# Altium PCB RX_Board.PcbDoc (part 4 of 5)
Units mm, origin at the board's own origin, x right, y up, seen from the top; angles counter-clockwise.
Board outline 69 x 69 mm, 4 copper layers (Top Layer, Int1 (GND), Int2 (GND), Bottom Layer), stack 1.586 mm thick; 118 components, 59 nets, 325 pads, 477 vias.
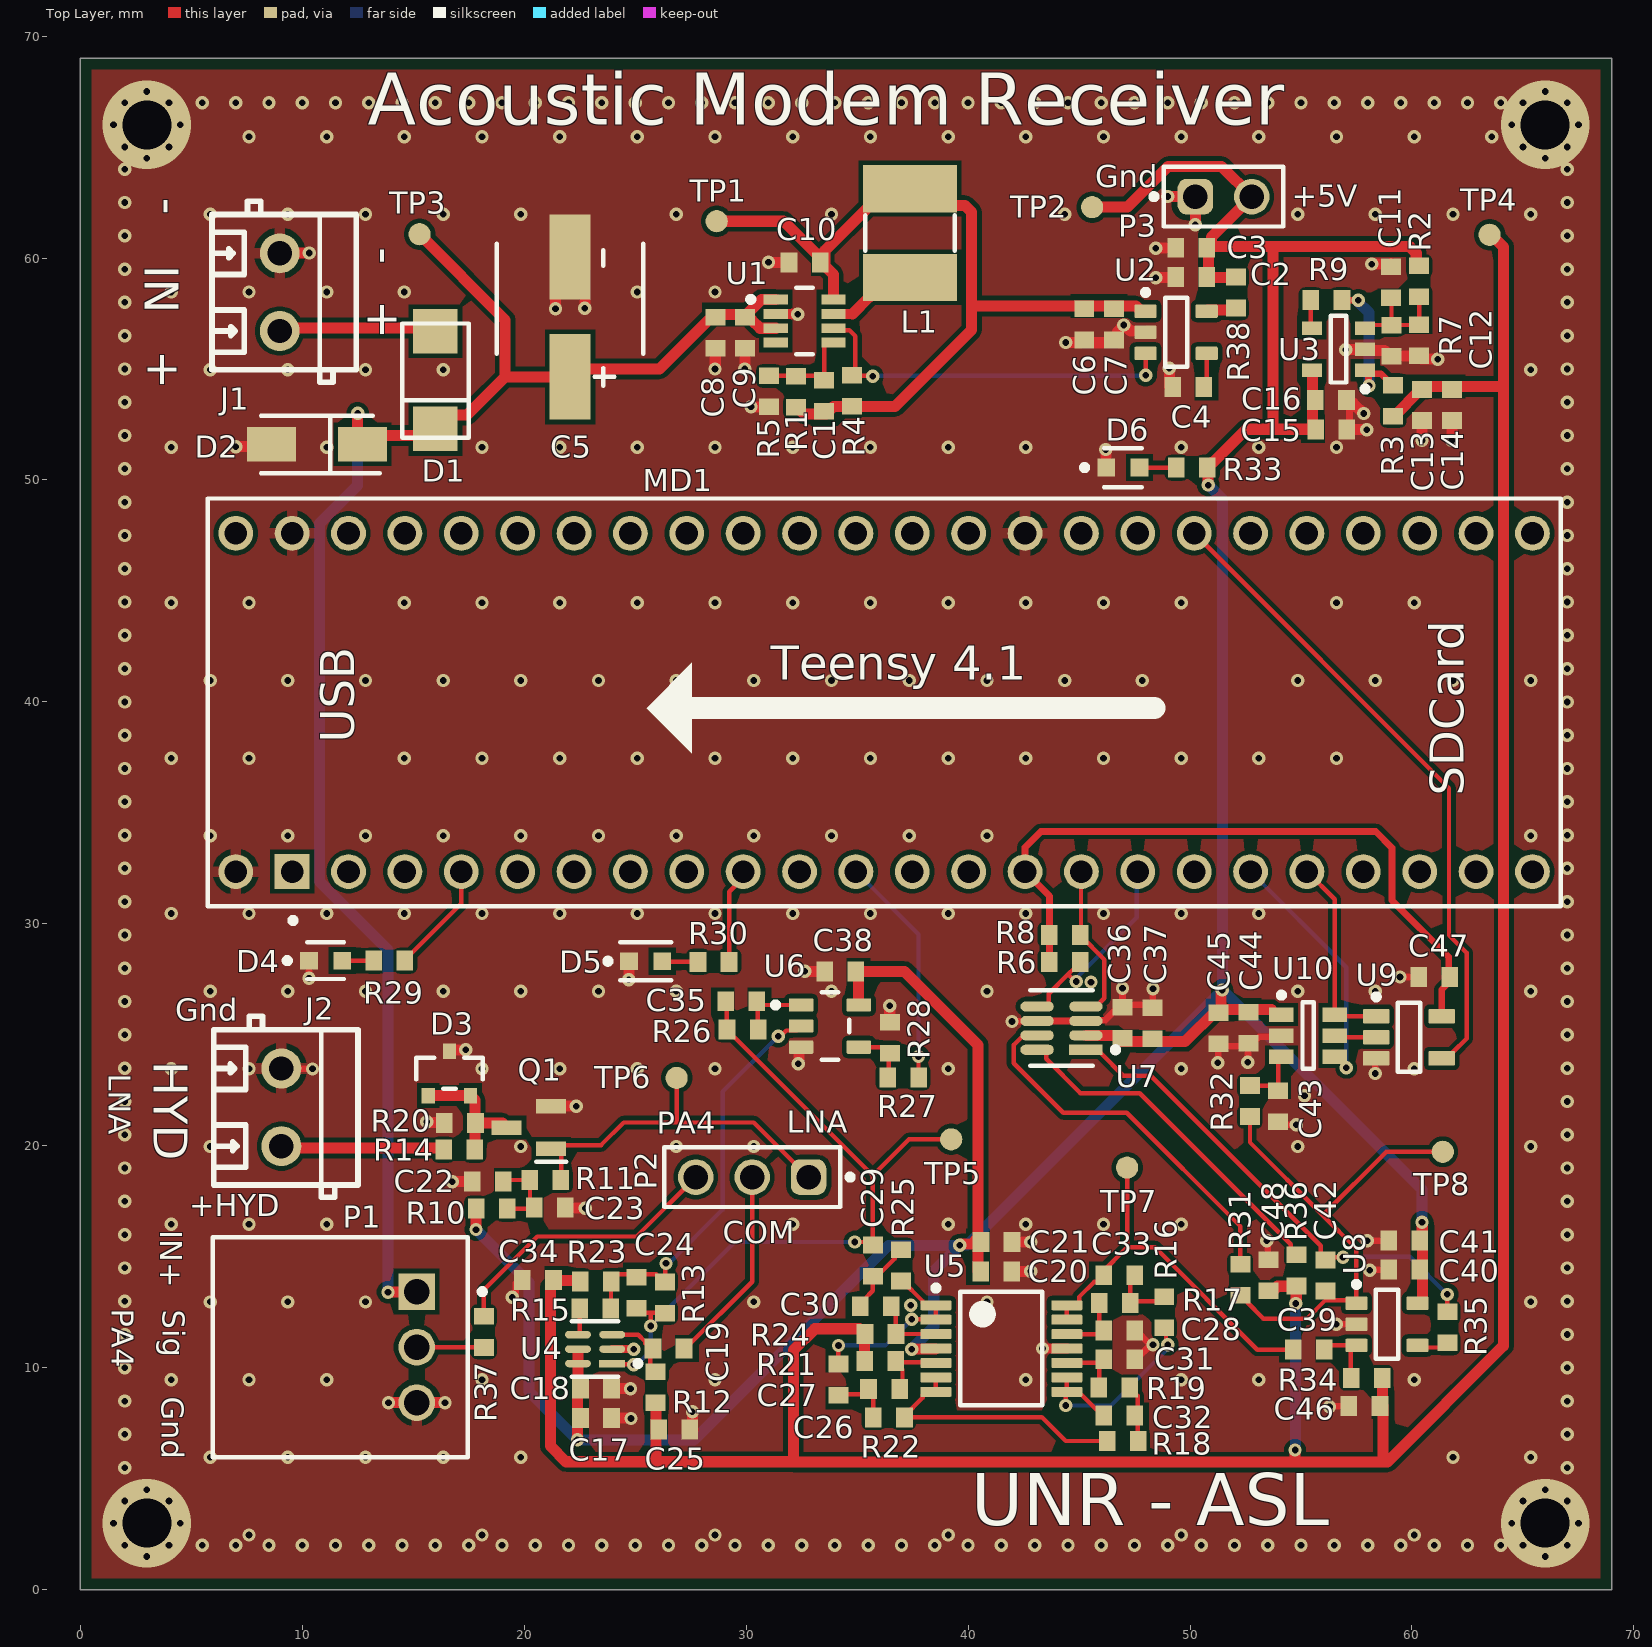
[diagram p0: Top Layer view]

## Part data (continued)
R37: library part 0603WAF3300T5E, "Fixed Resistor, Metal Glaze/thick Film, 0.1W, 330ohm, 75V, 1% +/-Tol, 100ppm/Cel, Surface Mount, 0603", Case/Package=0603, JLCPCB Part Number=C23138, Manufacturer="Royal Ohm", Max Operating Temperature=155°C, Min Operating Temperature=-55°C, Power Rating=100mW, Supplier Part Number=303-0603WAF3300T5E, Temperature Coefficient=100ppm/°C, Tolerance=1%, Working Voltage=75V, Category="Chip SMD Resistors", China RoHS=Non-Compliant, ComponentLink1Description=https://datasheet.octopart.com:443/0603WAF3300T5E-Royal-Ohm-datasheet-157855877.pdf?src-supplier=IHS, ComponentLink1URL=https://datasheet.octopart.com:443/0603WAF3300T5E-Royal-Ohm-datasheet-157855877.pdf?src-supplier=IHS, ComponentLink2Description=https://datasheet.octopart.com:443/0603WAF3300T5E-Royal-Ohm-datasheet-165785611.pdf?src-supplier=TME, ComponentLink2URL=https://datasheet.octopart.com:443/0603WAF3300T5E-Royal-Ohm-datasheet-165785611.pdf?src-supplier=TME, ComponentLink3Description=https://datasheet.octopart.com:443/0603WAF3300T5E-Royal-Ohm-datasheet-62069544.pdf?src-supplier=TME, ComponentLink3URL=https://datasheet.octopart.com:443/0603WAF3300T5E-Royal-Ohm-datasheet-62069544.pdf?src-supplier=TME, Country of Origin=Thailand, Export Control Classification Number (ECCN) Code=EAR99, Harmonized Tariff Schedule (HTS) Code=8533.21.00.30, Introduction Date=2016-08-18, Lifecycle Status=Production, Manufacturer Part Number=0603WAF3300T5E, Mounting Technology="Surface Mount", Number of Terminals=2, Pricing="10000=0.001 (USD)", REACH SVHC=Unaffected, RoHS=Compliant, Supplier=Mouser
R38: library part RC0603FR-070RL, "Zero Ohm Resistor, Jumper, 0603 [1608 Metric], Thick Film, 100 mW, 1 A, Surface Mount", Case Code (Imperial)=0603, Current Rating=1A, JLCPCB Part Number=C100044, Manufacturer="Yageo Group", Max Operating Temperature=155°C, Max Power Dissipation=100mW, Min Operating Temperature=-55°C, Temperature Coefficient=200ppm/°C, Tolerance=1%, Voltage Rating=75V, Voltage Rating (DC)=50V, Case/Package=0603, Category="Chip SMD Resistors", China RoHS=Non-Compliant, ComponentLink1Description=https://datasheet.octopart.com:443/RC0603FR-070RL-Yageo-datasheet-127823281.pdf?src-supplier=Upverter, ComponentLink1URL=https://datasheet.octopart.com:443/RC0603FR-070RL-Yageo-datasheet-127823281.pdf?src-supplier=Upverter, ComponentLink2Description=https://datasheet.octopart.com:443/RC0603FR-070RL-Yageo-datasheet-30459151.pdf?src-supplier=IHS, ComponentLink2URL=https://datasheet.octopart.com:443/RC0603FR-070RL-Yageo-datasheet-30459151.pdf?src-supplier=IHS, ComponentLink3Description=https://datasheet.octopart.com:443/RC0603FR-070RL-Yageo-datasheet-8328172.pdf?src-supplier=element14+APAC, ComponentLink3URL=https://datasheet.octopart.com:443/RC0603FR-070RL-Yageo-datasheet-8328172.pdf?src-supplier=element14+APAC, ComponentLink4Description=https://datasheet.octopart.com:443/RC0603FR-070RL-Yageo-datasheet-34211833.pdf?src-supplier=Newark, ComponentLink4URL=https://datasheet.octopart.com:443/RC0603FR-070RL-Yageo-datasheet-34211833.pdf?src-supplier=Newark, ComponentLink5Description=https://datasheet.octopart.com:443/RC0603FR-070RL-Yageo-Group-datasheet-176638170.pdf?src-supplier=Future+Electronics, ComponentLink5URL=https://datasheet.octopart.com:443/RC0603FR-070RL-Yageo-Group-datasheet-176638170.pdf?src-supplier=Future+Electronics, ComponentLink6Description=https://datasheet.octopart.com:443/RC0603FR-070RL-Yageo-datasheet-164759695.pdf?src-supplier=Future+Electronics, ComponentLink6URL=https://datasheet.octopart.com:443/RC0603FR-070RL-Yageo-datasheet-164759695.pdf?src-supplier=Future+Electronics, ComponentLink7Description=https://datasheet.octopart.com:443/RC0603FR-070RL-Yageo-datasheet-137700087.pdf?src-supplier=Future+Electronics, ComponentLink7URL=https://datasheet.octopart.com:443/RC0603FR-070RL-Yageo-datasheet-137700087.pdf?src-supplier=Future+Electronics, ComponentLink8Description=https://datasheet.octopart.com:443/RC0603FR-070RL-Yageo-datasheet-15599030.pdf?src-supplier=Future+Electronics, ComponentLink8URL=https://datasheet.octopart.com:443/RC0603FR-070RL-Yageo-datasheet-15599030.pdf?src-supplier=Future+Electronics, ComponentLink9Description=https://datasheet.octopart.com:443/RC0603FR-070RL-Yageo-datasheet-12596169.pdf?src-supplier=Future+Electronics, ComponentLink9URL=https://datasheet.octopart.com:443/RC0603FR-070RL-Yageo-datasheet-12596169.pdf?src-supplier=Future+Electronics, ComponentLink10Description=https://datasheet.octopart.com/RC0603FR-070RL-Yageo-datasheet-73766026.pdf, ComponentLink10URL=https://datasheet.octopart.com/RC0603FR-070RL-Yageo-datasheet-73766026.pdf, ComponentLink11Description=http://sigma.octopart.com:80/conflict_mineral_statement/Yageo-company-3.pdf?src-supplier=Compliance+Statements, ComponentLink11URL=http://sigma.octopart.com:80/conflict_mineral_statement/Yageo-company-3.pdf?src-supplier=Compliance+Statements, ComponentLink12Description=http://sigma.octopart.com:80/rohs_statement/Yageo-company-2.pdf?src-supplier=Compliance+Statements, ComponentLink12URL=http://sigma.octopart.com:80/rohs_statement/Yageo-company-2.pdf?src-supplier=Compliance+Statements, Composition="Thick Film", Contact Plating=Tin, Depth=800µm, Features="Moisture Resistant", Height=450µm, Lead Free="Lead Free", Length=1.6mm, Lifecycle Status=Production, Manufacturer Part Number=RC0603FR-070RL, Military Standard=Not, Mounting Technology="Surface Mount", Number of Terminals=2, Number of Terminations=2, Packaging="Tape & Reel", Pins=2, Power Rating=100mW, Pricing="1=0.101, 25=0.009, 100=0.008, 250=0.007, 500=0.006, 1000=0.005, 2500=0.004 (USD)", Radiation Hardening=No, REACH SVHC=Unaffected, RoHS=Compliant, Schedule B="8533210045, 8533210045|8533210045|8533210045|8533210045|8533210045", Stock=190618, Supplier=Avnet, Supplier Part Number=RC0603FR-070RL, Termination=SMD/SMT, Width=800µm, Working Voltage=75V
U1: library part CMP-04918-000358-1, "IC REG BUCK ADJ 75MA SOT23-8", Case/Package=SOT-23-8, Max Input Voltage=15V, Max Operating Temperature=85°C, Max Output current=75mA, Max Output Voltage=5.5V, Min Input Voltage=2V, Min Operating Temperature=-40°C, Min Output Voltage=1.2V, Package Quantity=1, Quiescent Current=11uA, Switching Frequency=800kHz, Efficiency=96%, Lead Free="Lead Free", Mount="Surface Mount", Number of Outputs=1, Number of Pins=8, Operating Supply Voltage=15V, Output Current=75mA, Output Type=Adjustable, Output Voltage=5.5V, Packaging="Tape and Reel", Radiation Hardening=No, REACH SVHC="No SVHC", RoHS Compliant=Yes, Series=-, Synchronous Rectifier=Yes
U2: library part CMP-0394-00659-2, "Single Output Fast Transient Response LDO, 150 mA, Fixed 5 V Output, 1.7 to 5.5 V Input, 5-pin SOT-23 (DBV), -40 to 85 degC, Green (RoHS & no Sb/Br)", Manufacturer="Texas Instruments", Accuracy(%)=1, Code_JEDEC=MO-178, ComponentLink1Description="Manufacturer URL", ComponentLink1URL=http://www.ti.com/, ComponentLink2Description=Datasheet, ComponentLink2URL=http://www.ti.com/general/docs/lit/getliterature.tsp?genericPartNumber=TPS73150&fileType=pdf, ComponentLink3Description="Package Specification", ComponentLink3URL=http://www.ti.com/litv/pdf/mpds018i, DatasheetVersion=SBVS034M, Eco-Plan="Green (RoHS & no Sb/Br)", Fixed Output Options(V)=5, Iout(Max)(A)=0.15, Iq(Typ)(mA)=0.4, Mounting Technology="Surface Mount", PackageDescription="5-Pin Plastic Small Outline, Body 1.60 Ãƒâ€” 2.90 mm, Pitch 0.95 mm", PackageReference=DBV0005A, PackageVersion=4073253-4/K, PartNumber=TPS73150DBVR, SubFamily="Single Channel LDO", Vdo(Typ)(mV)=30, Vin(Max)(V)=5.5, Vin(Min)(V)=1.7, Vout Adj(Max)(V)=5, Vout Adj(Min)(V)=5
U3: library part CMP-0384-01443-3, "Single Channel RRIO Operational Amplifier, 80 MHz BW, 35 V/us SR, Industrial, 5-pin SOT23 (RJ-5), Reel", Amplifiers Per Package=1, Generic Part Number=AD8031, Input Bias Current=450nA, Input Offset Voltage=1mV, Manufacturer="Analog Devices", Code_JEDEC=MO-178-AA, ComponentLink1Description="Manufacturer URL", ComponentLink1URL=http://www.analog.com/en/index.html, ComponentLink2Description=Datasheet, ComponentLink2URL=http://www.analog.com/static/imported-files/data_sheets/AD8031_8032.pdf, ComponentLink3Description="Package Specification", ComponentLink3URL=http://www.analog.com/static/imported-files/packages/PKG_PDF/SOT-23(RJ)/RJ_5.pdf, ComponentLink4Description="Reference Circuit", ComponentLink4URL=http://www.analog.com/en/all-operational-amplifiers-op-amps/operational-amplifiers-op-amps/ad8031/products/product.html#product-recommendations, DatasheetVersion="Rev. D", Iq/Amp=900uA, Mounting Technology="Surface Mount", PackageDescription="5-Pin Small Outline Transistor Package, Body 2.9 x 1.6 mm, Pitch 0.95 mm", PackageReference=RJ-5, PackageVersion=121608-A, Packing=Reel, PartNumber=AD8031ARTZ-REEL7, RevisionNote="Reference Circuit URL fixed", Slew Rate=35V/us, Small Signal Bandwidth=80MHz, V Span Max=12V, V Span Min=2.7V